# EAGLE board RHD2132_lvds_headstage_3_1 (EAGLE 6.3)
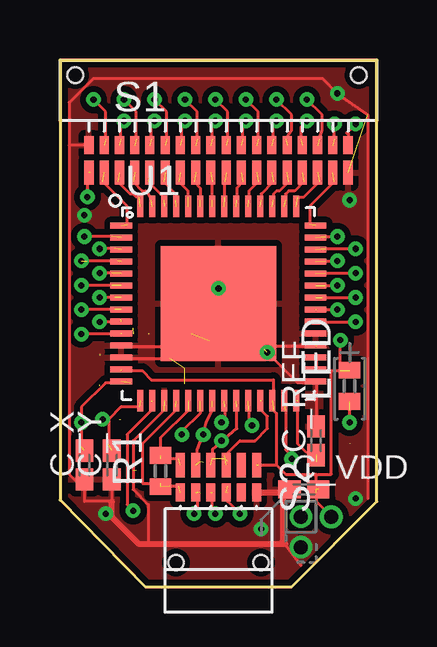
[diagram p0: board, top side]
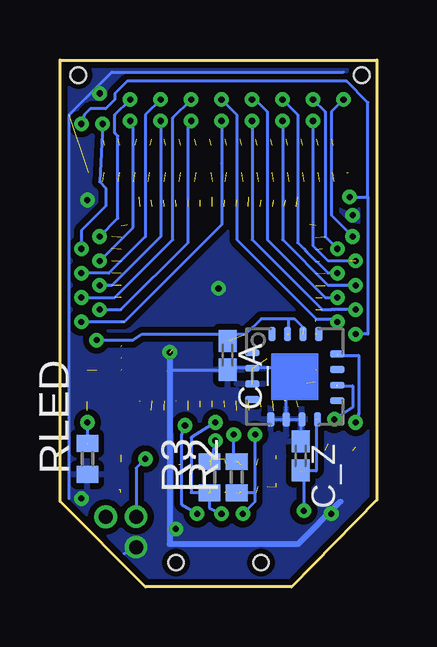
[diagram p1: board, bottom side, seen from below]

Size 13.21 x 21.97 mm. Coordinates in mm from the lower left corner, seen from the top.
Outline: 0,21.97 0,3.62 3.56,0 9.65,0 13.21,3.56 13.21,21.97 0,21.97
Copper layers (1*16): Top 0.0178mm / dielectric 59mil / Bottom 0.0178mm
Design rules "default": minimum track width 5mil, minimum drill 10mil, track to track 5mil, track to pad 5mil, pad to pad 5mil, via to via 5mil, smd to smd 5mil, copper to edge 10mil, drill to drill 16mil, minimum pad ring 8mil, minimum via ring 7mil, stop-mask expansion 3mil, vias tented up to drill 0mil, thermal gap 10mil
Holes 0.64 mm at 0.63,21.34 12.45,21.34 4.83,1.02 8.38,1.02

## Footprints (pad centres in the part's own frame; a part is rotated, then mirrored left to right if it is on the bottom)
C0402K = smd 0.925 x 0.74: 1 -0.6,0; 2 0.6,0
R0402 = smd 0.7 x 0.9: 1 -0.65,0; 2 0.65,0
OMNETICS_A79025 = smd 0.381 x 0.762: B1 -5.397,-1.016; B2 -4.763,-1.016; B3 -4.128,-1.016; B4 -3.493,-1.016; B5 -2.857,-1.016; B6 -2.223,-1.016; B7 -1.587,-1.016; B8 -0.953,-1.016; B9 -0.318,-1.016; B10 0.318,-1.016; B11 0.953,-1.016; B12 1.587,-1.016; B13 2.223,-1.016; B14 2.857,-1.016; B15 3.493,-1.016; B16 4.128,-1.016; B17 4.763,-1.016; B18 5.397,-1.016 | smd 0.381 x 1.016: T1 -5.397,-2.159; T2 -4.763,-2.159; T3 -4.128,-2.159; T4 -3.493,-2.159; T5 -2.857,-2.159; T6 -2.223,-2.159; T7 -1.587,-2.159; T8 -0.953,-2.159; T9 -0.318,-2.159; T10 0.318,-2.159; T11 0.953,-2.159; T12 1.587,-2.159; T13 2.223,-2.159; T14 2.857,-2.159; T15 3.493,-2.159; T16 4.128,-2.159; T17 4.763,-2.159; T18 5.397,-2.159
OMNETICS_PZN-12-AA = smd 0.381 x 0.762: B1 1.587,-1.016; B2 0.953,-1.016; B3 0.318,-1.016; B4 -0.318,-1.016; B5 -0.953,-1.016; B6 -1.587,-1.016 | smd 0.381 x 1.016: T1 1.587,-2.159; T2 0.953,-2.159; T3 0.318,-2.159; T4 -0.318,-2.159; T5 -0.953,-2.159; T6 -1.587,-2.159
QFN56_8_X_8_LARGE = smd 0.9 x 0.25: 1 -4.05,3.25; 2 -4.05,2.75; 3 -4.05,2.25; 4 -4.05,1.75; 5 -4.05,1.25; 6 -4.05,0.75; 7 -4.05,0.25; 8 -4.05,-0.25; 9 -4.05,-0.75; 10 -4.05,-1.25; 11 -4.05,-1.75; 12 -4.05,-2.25; 13 -4.05,-2.75; 14 -4.05,-3.25; 29 4.05,-3.25; 30 4.05,-2.75; 31 4.05,-2.25; 32 4.05,-1.75; 33 4.05,-1.25; 34 4.05,-0.75; 35 4.05,-0.25; 36 4.05,0.25; 37 4.05,0.75; 38 4.05,1.25; 39 4.05,1.75; 40 4.05,2.25; 41 4.05,2.75; 42 4.05,3.25 | smd 0.25 x 0.9: 15 -3.25,-4.05; 16 -2.75,-4.05; 17 -2.25,-4.05; 18 -1.75,-4.05; 19 -1.25,-4.05; 20 -0.75,-4.05; 21 -0.25,-4.05; 22 0.25,-4.05; 23 0.75,-4.05; 24 1.25,-4.05; 25 1.75,-4.05; 26 2.25,-4.05; 27 2.75,-4.05; 28 3.25,-4.05; 43 3.25,4.05; 44 2.75,4.05; 45 2.25,4.05; 46 1.75,4.05; 47 1.25,4.05; 48 0.75,4.05; 49 0.25,4.05; 50 -0.25,4.05; 51 -0.75,4.05; 52 -1.25,4.05; 53 -1.75,4.05; 54 -2.25,4.05; 55 -2.75,4.05; 56 -3.25,4.05 | smd 4.8 x 4.8: CENTER 0,0
ADXL335 = smd 0.61 x 0.305: COM1 -1.775,-0.3; NC1 -1.775,1; NC2 -1.775,-0.95; NC3 1.775,-1; NC4 1.775,0.3; ST -1.775,0.35; XOUT 1.775,0.95; YOUT 1.775,-0.35 | smd 0.305 x 0.61: COM2 -1,-1.775; COM3 -0.35,-1.775; COM4 0.3,-1.775; NC5 1,1.775; NC6 -0.95,1.775; VS1 0.35,1.775; VS2 -0.3,1.775; ZOUT 0.95,-1.775

## Placement (x,y rotation side)
C_A  0.1uF  [C0402K]  6.22,9.65 270 bottom
C_REF  10nF  [C0402K]  10.67,6.1 90 top
C_VDD  10uF  [C0402K]  10.16,4.06 0 top
C_X  0.1uF  [C0402K]  1.02,5.08 90 top
C_Y  0.1uF  [C0402K]  2.16,5.08 90 top
C_Z  0.1uF  [C0402K]  3.18,5.46 270 bottom
LED  [R0402]  12.06,8.38 90 top
R1  100  [R0402]  4.19,4.83 90 top
R2  100  [R0402]  5.84,4.57 90 bottom
R3  100  [R0402]  6.99,4.57 90 bottom
RLED  300  [R0402]  12.06,5.33 90 bottom
S1  OMNETICS_A79025  [OMNETICS_A79025]  6.6,19.43 0 top
S2  RHD2000-CABLE-AMP-SIDE  [OMNETICS_PZN-12-AA]  6.6,2.92 180 top
U1  RHD2132_QFN  [QFN56_8_X_8_LARGE]  6.6,11.81 0 top
U$1  ADXL335  [ADXL335]  3.43,8.76 0 bottom

## Library data of the parts
C_A C_REF C_VDD C_X C_Y C_Z LED R1-R3 RLED = resistor
S1 S2 U1 = RHD2000
U$1 = voigts

## Nets
ADC_REF: C_REF.1 U1.28
AUXOUT: U1.27
CS+: R1.2 S2.T1 U1.19
CS-: R1.1 S2.B1 U1.18
GND: C_A.2 C_REF.2 C_VDD.1 C_X.1 C_Y.1 C_Z.1 RLED.1 S1.B1 S1.T18 S2.B6 U1.11 U1.12 U1.17 U1.29 U1.32 U1.33 U1.CENTER U$1.COM1 U$1.COM2 U$1.COM3 U$1.COM4 U$1.ST
IN0: S1.B10 U1.9
IN1: S1.B7 U1.8
IN2: S1.B8 U1.7
IN3: S1.B5 U1.6
IN4: S1.B6 U1.5
IN5: S1.B3 U1.4
IN6: S1.B4 U1.3
IN7: S1.B2 U1.2
IN8: S1.T2 U1.1
IN9: S1.T3 U1.56
IN10: S1.T4 U1.55
IN11: S1.T5 U1.54
IN12: S1.T6 U1.53
IN13: S1.T7 U1.52
IN14: S1.T8 U1.51
IN15: S1.T9 U1.50
IN16: S1.T10 U1.49
IN17: S1.T11 U1.48
IN18: S1.T12 U1.47
IN19: S1.T13 U1.46
IN20: S1.T14 U1.45
IN21: S1.T15 U1.44
IN22: S1.T16 U1.43
IN23: S1.T17 U1.42
IN24: S1.B16 U1.41
IN25: S1.B17 U1.40
IN26: S1.B15 U1.39
IN27: S1.B14 U1.38
IN28: S1.B13 U1.37
IN29: S1.B12 U1.36
IN30: S1.B11 U1.35
IN31: S1.B9 U1.34
LEDOUT: LED.1 RLED.2
MISO1+: S2.T4 U1.25
MISO1-: S2.B4 U1.24
MOSI+: R3.2 S2.T3 U1.23
MOSI-: R3.1 S2.B3 U1.22
REF: S1.B18 S1.T1 U1.10
SCLK+: R2.2 S2.T2 U1.21
SCLK-: R2.1 S2.B2 U1.20
VDD: C_A.1 C_VDD.2 LED.2 S2.T6 U1.13 U1.26 U1.30 U1.31 U$1.VS1 U$1.VS2
XOUT: C_X.2 U1.14 U$1.XOUT
YOUT: C_Y.2 U1.15 U$1.YOUT
ZOUT: C_Z.2 U1.16 U$1.ZOUT

## Tracks (layer width: path | path; a pad name or v marks a point on that pad's centre or on a via)
ADC_REF  (2 unrouted)
  Top 0.127: 10.67,5.21 9.91,5.97 9.91,7.75
AUXOUT  (via drill 0.25, 0.58)  (1 unrouted)
  Top 0.127: 9.4,7.37 9.4,5.72 9.65,5.46 v9.65,5.33
  Bottom 0.127: v9.65,5.33 10.03,4.95 v10.03,2.92
CS+  (3 unrouted)
  Top 0.127: 5.33,7.37 4.19,6.22 4.19,5.33 4.95,5.33
CS-  (4 unrouted)
  Top 0.127: 4.95,4.19 4.57,4.19 | 4.83,7.49 4.83,7.37 3.43,5.97 3.43,4.32 4.19,4.32
GND  (via drill 0.25, 0.58)  (6 unrouted)
  Top 0.127: 8.89,9.52 9.91,8.51 10.67,8.51 10.67,6.99 | 4.32,7.37 3.05,6.1 3.05,4.06 3.68,3.43 3.68,1.78 | 0.38,18.41 0.38,20.19 1.4,21.21 10.92,21.21 v11.56,20.57 12.83,19.68 12.83,3.68 | 0.38,18.41 0.38,4.7 1.02,4.06 1.02,3.56 2.16,3.56 2.16,4.7 | 2.54,10.03 4.83,10.03 | 2.54,9.52 4.57,9.52 5.08,10.03 4.83,10.03 | 4.83,10.03 6.6,11.3 | 10.67,10.03 8.64,10.03 8.51,9.91 | 10.03,0.89 9.27,1.91 | 1.14,18.41 0.38,18.41
  Top 0.254: 8.26,3.94 9.27,3.94 9.27,1.91 9.4,1.78 3.68,1.78 3.3,1.78 2.16,2.92 2.16,3.56
  Bottom 0.127: 4.32,6.99 3.81,6.99 | 3.81,6.99 3.18,6.99 3.18,6.1 | 3.81,6.99 3.81,9.14 6.22,9.14 6.22,9.02 8.64,9.02 | 1.4,21.46 11.05,21.46 12.83,19.68 12.83,3.68 | 10.54,1.4 v10.03,1.65
  Bottom 0.254: v8.64,9.78 8.64,9.02 8.64,1.78 3.3,1.78 1.52,3.56
  other vias: 8.38,2.41 6.6,12.45 1.02,15.49 12.32,3.68 1.9,3.05 12.06,16.13
  pour Top (isolate 0.254): 0.13,21.97 0.13,3.75 3.68,0.25 10.03,0 13.08,3.68 13.21,21.97
  pour Bottom (isolate 0.254): 0.13,21.97 0,3.62 3.18,-0.13 10.29,-0.13 13.08,3.68 13.21,21.97
IN0  (via drill 0.25)  (2 unrouted)
  Top 0.127: 6.99,18.67 6.99,19.81 v6.48,20.32 | 2.41,11.05 v1.65,11.05
  Bottom 0.127: v6.48,20.32 5.84,19.68 5.84,14.48 2.54,11.18 1.78,11.18 v1.65,11.05
IN1  (via drill 0.25)  (2 unrouted)
  Top 0.127: 5.08,18.67 5.08,19.3 v5.21,19.43 | 2.29,11.56 v0.89,11.56
  Bottom 0.127: v5.21,19.43 5.21,14.48 2.29,11.56 1.9,11.56 1.78,11.56 v0.89,11.56
IN2  (via drill 0.25)  (2 unrouted)
  Top 0.127: 2.29,12.06 v1.65,12.06 | 5.71,18.67 5.71,19.81 v5.21,20.32
  Bottom 0.127: v5.21,20.32 5.08,20.32 4.57,19.81 4.57,14.48 2.16,12.06 v1.65,12.06
IN3  (via drill 0.25)  (2 unrouted)
  Top 0.127: 2.16,12.57 v0.89,12.57 | 3.81,18.67 3.81,19.3 v3.94,19.43
  Bottom 0.127: v0.89,12.57 2.03,12.57 3.94,14.48 v3.94,19.43
IN4  (via drill 0.25)  (2 unrouted)
  Top 0.127: 2.16,13.08 v1.65,13.08 | 4.45,18.67 4.45,19.81 v3.94,20.32
  Bottom 0.127: v3.94,20.32 3.3,19.68 3.3,14.35 3.05,14.1 2.92,13.97 2.03,13.08 v1.65,13.08
IN5  (via drill 0.25)  (3 unrouted)
  Top 0.127: 2.41,13.59 v0.89,13.59 | 2.54,18.67 2.54,19.18 2.67,19.3 v2.67,19.43
  Bottom 0.127: 1.14,13.59 2.03,13.59 2.67,14.22 v2.67,19.43
IN6  (via drill 0.25)  (2 unrouted)
  Top 0.127: 3.18,18.67 3.18,19.81 v2.67,20.32 | 2.29,14.1 v1.65,14.1
  Bottom 0.127: v2.67,20.32 2.16,19.81 2.16,14.61 v1.65,14.1
IN7  (via drill 0.25)  (2 unrouted)
  Top 0.127: 1.9,18.67 1.9,19.81 v1.4,20.32 | 2.16,14.61 v1.02,14.61
  Bottom 0.127: v1.4,20.32 1.9,19.81 1.9,15.49 v1.02,14.61
IN8  (2 unrouted)
  Top 0.127: 2.79,15.11 2.79,15.88 1.78,16.89
IN9  (2 unrouted)
  Top 0.127: 3.3,16.26 3.18,16.26 3.05,16.38 2.92,16.38 2.41,16.89
IN10  (2 unrouted)
  Top 0.127: 3.05,16.89 3.43,16.51 3.56,16.51 3.68,16.38 3.81,16.13
IN11  (2 unrouted)
  Top 0.127: 3.68,16.89 4.32,16.26 4.32,16.13
IN12  (2 unrouted)
  Top 0.127: 4.32,16.89 4.83,16.38 4.83,16.13
IN13  (2 unrouted)
  Top 0.127: 5.33,16.26 5.33,16.51 4.95,16.89
IN14  (2 unrouted)
  Top 0.127: 5.59,16.89 5.84,16.64 5.84,16.13
IN15  (2 unrouted)
  Top 0.127: 6.35,16.13 6.35,16.89
IN16  (2 unrouted)
  Top 0.127: 6.86,16.26 6.86,16.89
IN17  (2 unrouted)
  Top 0.127: 7.62,16.89 7.37,16.64 7.37,16.13
IN18  (2 unrouted)
  Top 0.127: 8.26,16.89 7.87,16.51 7.87,16.13
IN19  (2 unrouted)
  Top 0.127: 8.89,16.89 8.38,16.38 8.38,16.13
IN20  (2 unrouted)
  Top 0.127: 9.53,16.89 9.14,16.51 9.02,16.51 8.89,16.38 8.89,16.13
IN21  (2 unrouted)
  Top 0.127: 10.16,16.89 9.78,16.51 9.53,16.51 9.4,16.38 9.4,16.13
IN22  (2 unrouted)
  Top 0.127: 9.91,16.26 10.16,16.26 10.79,16.89
IN23  (2 unrouted)
  Top 0.127: 11.43,16.89 10.41,15.88 10.41,15.11
IN24  (via drill 0.25)  (2 unrouted)
  Top 0.127: 11.05,14.61 v11.56,14.61 | 10.79,18.67 10.92,19.05 10.92,19.68 v10.29,20.32
  Bottom 0.127: v11.56,14.61 10.79,15.37 10.79,18.8 10.92,18.92 10.92,19.68 v10.29,20.32
IN25  (via drill 0.25)  (2 unrouted)
  Top 0.127: 11.43,18.67 v11.43,19.3 | 11.05,14.1 v12.32,14.1
  Bottom 0.127: v11.43,19.3 11.56,16.89 11.3,16.64 11.3,15.88 12.32,14.86 v12.32,14.1
IN26  (via drill 0.25)  (2 unrouted)
  Top 0.127: 11.05,13.59 v11.56,13.59 | v10.29,19.43 10.03,19.18 10.03,18.67
  Bottom 0.127: v11.56,13.59 10.16,14.99 10.16,19.3 v10.29,19.43
IN27  (via drill 0.25)  (2 unrouted)
  Top 0.127: v9.02,20.32 9.65,19.68 9.65,19.05 9.4,18.67 | 11.05,13.08 v12.32,13.08
  Bottom 0.127: v9.02,20.32 9.65,19.68 9.65,14.61 11.18,13.08 v12.32,13.08
IN28  (via drill 0.25)  (2 unrouted)
  Top 0.127: 11.05,12.57 v11.56,12.57 | 8.89,18.67 8.89,19.3 v9.02,19.43
  Bottom 0.127: v9.02,19.43 9.02,14.61 11.05,12.57 v11.56,12.57
IN29  (via drill 0.25)  (2 unrouted)
  Top 0.127: 11.05,12.06 v12.32,12.06 | 8.26,18.67 8.26,19.81 v7.75,20.32
  Bottom 0.127: v12.32,12.06 10.92,12.06 8.51,14.48 8.51,19.56 v7.75,20.32
IN30  (via drill 0.25)  (2 unrouted)
  Top 0.127: 10.92,11.56 v11.56,11.56 | 7.62,18.67 7.62,19.3 v7.75,19.43
  Bottom 0.127: v11.56,11.56 10.67,11.56 7.87,14.35 7.87,19.3 v7.75,19.43
IN31  (via drill 0.25)  (2 unrouted)
  Top 0.127: 6.35,18.67 6.35,19.3 v6.48,19.43 | 10.92,11.05 v12.32,11.05
  Bottom 0.127: v6.48,19.43 6.48,17.65 6.48,15.11 10.54,11.05 v12.32,11.05
LEDOUT  (via drill 0.25)  (2 unrouted)
  Top 0.127: v12.06,6.86 12.06,7.37
  Bottom 0.127: v12.06,6.86 12.06,5.97
MISO1+  (2 unrouted)
  Top 0.127: 8.38,7.75 8.38,7.37 8.64,7.11 8.64,6.6 8.13,6.1 7.49,6.1 6.86,5.46
MISO1-  (via drill 0.25)  (2 unrouted)
  Top 0.127: 7.87,7.37 7.87,6.86 v8,6.73 | 6.99,4.19 6.99,3.56 v7.49,3.05
  Bottom 0.127: v7.49,3.05 8.13,3.43 8.13,6.35 8,6.6 v8,6.73
MOSI+  (via drill 0.25)  (4 unrouted)
  Top 0.127: 7.37,7.49 7.37,6.6 6.35,5.72 6.35,5.33
  Bottom 0.127: 6.86,5.33 v6.73,6.1
MOSI-  (via drill 0.25)  (3 unrouted)
  Top 0.127: 6.86,7.49 6.86,6.99 v6.73,6.86 | v6.48,3.05 6.48,3.17 6.35,3.3 6.35,3.94
  Bottom 0.127: v6.73,6.86 7.75,6.22 7.75,3.94 6.99,3.94 6.99,3.3 v6.48,3.05
N$1
  Bottom 0.127: 5.21,9.02 5.21,8.51
REF  (via drill 0.25)  (2 unrouted)
  Top 0.127: 1.27,17.27 1.14,16.76 v1.14,16.26 | v12.32,19.3 11.94,18.92 12,18.92 S1.B18 | 2.54,10.54 v0.89,10.54
  Bottom 0.127: v1.14,16.26 0.38,16.26 | 0.38,16.26 0.38,10.54 v0.89,10.54 | 0.38,16.26 0.38,20.19 1.27,21.08 10.41,21.08 10.92,20.57 10.92,20.32 11.3,19.94 11.94,19.94 12.19,19.68 v12.32,19.3
SCLK+  (via drill 0.25)  (3 unrouted)
  Top 0.127: 5.71,5.59 5.71,5.72 v5.97,6.35 6.1,6.86 6.35,7.37 6.35,7.49
  Bottom 0.127: 5.97,5.21 5.97,5.33 v5.97,6.35
SCLK-  (via drill 0.25)  (3 unrouted)
  Top 0.127: 5.84,7.37 5.84,7.24 5.08,6.48 v5.08,6.35 | 5.71,4.19 5.71,3.17 v5.59,3.05
  Bottom 0.127: v5.59,3.05 5.08,3.56 5.08,3.94 | 5.08,3.94 v5.08,6.35 | 5.71,3.94 5.08,3.94
VDD  (via drill 0.25, 0.6)  (12 unrouted)
  Top 0.127: 8.89,7.37 9.02,7.24 9.02,5.08 | 11.3,9.02 10.67,9.02 10.67,9.52 | 8.26,5.08 9.02,5.08 | 9.02,5.08 9.4,4.7 10.67,4.7 | 2.54,9.02 3.43,9.02 3.81,8.64 8.89,8.64 8.89,7.49 | 10.67,4.06 10.67,4.7 | 10.67,4.7 11.3,4.7 11.3,9.02 | 11.3,9.02 11.68,9.02 v11.68,10.29 | 10.67,3.94 10.67,3.56 v11.3,2.92
  Bottom 0.127: 3.68,10.54 3.68,11.18 | 3.68,11.18 4.83,11.18 5.46,10.54 9.78,10.54 10.16,10.29 v11.68,10.29 | 3.05,10.79 3.43,11.18 3.68,11.18
XOUT  (via drill 0.25)  (3 unrouted)
  Top 0.127: 2.92,8.51 1.9,8.51 0.89,7.49 v0.89,6.86 0.89,5.84
  Bottom 0.127: 1.65,9.65 0.76,9.65 0.76,7.24 v0.89,6.86
YOUT  (via drill 0.25)  (3 unrouted)
  Top 0.127: 3.3,7.49 2.54,7.49 2.03,6.99 | v1.78,6.99 2.03,6.99 | 2.03,6.99 2.03,5.97
  Bottom 0.127: 1.65,8.38 1.02,8.38 1.02,7.49 v1.78,6.99
ZOUT  (via drill 0.25)  (3 unrouted)
  Top 0.127: v3.05,3.17 2.79,3.43 2.79,6.35 3.81,7.37 3.81,7.75
  Bottom 0.127: 2.54,6.99 2.54,4.83 3.05,4.83 v3.05,3.17 3.05,4.7

## Text on the board
tDocu: C_x | C_y | C_ref | vcc | led | r100 | C_vdd | ao
bDocu: 32ch headstage | rev 2.0 omnetics | dec 2012 | open-ephys.org | powered by | intan | C_A | adxl335 | C_z | r100 | r_led | r100